# Altium PCB 12864.PcbDoc
Units mm, origin at the board's own origin, x right, y up, seen from the top; angles counter-clockwise.
Board outline 100 x 50 mm, 2 copper layers (Top Layer, Bottom Layer), stack 1.56 mm thick; 21 components, 32 nets, 115 pads, 61 vias.
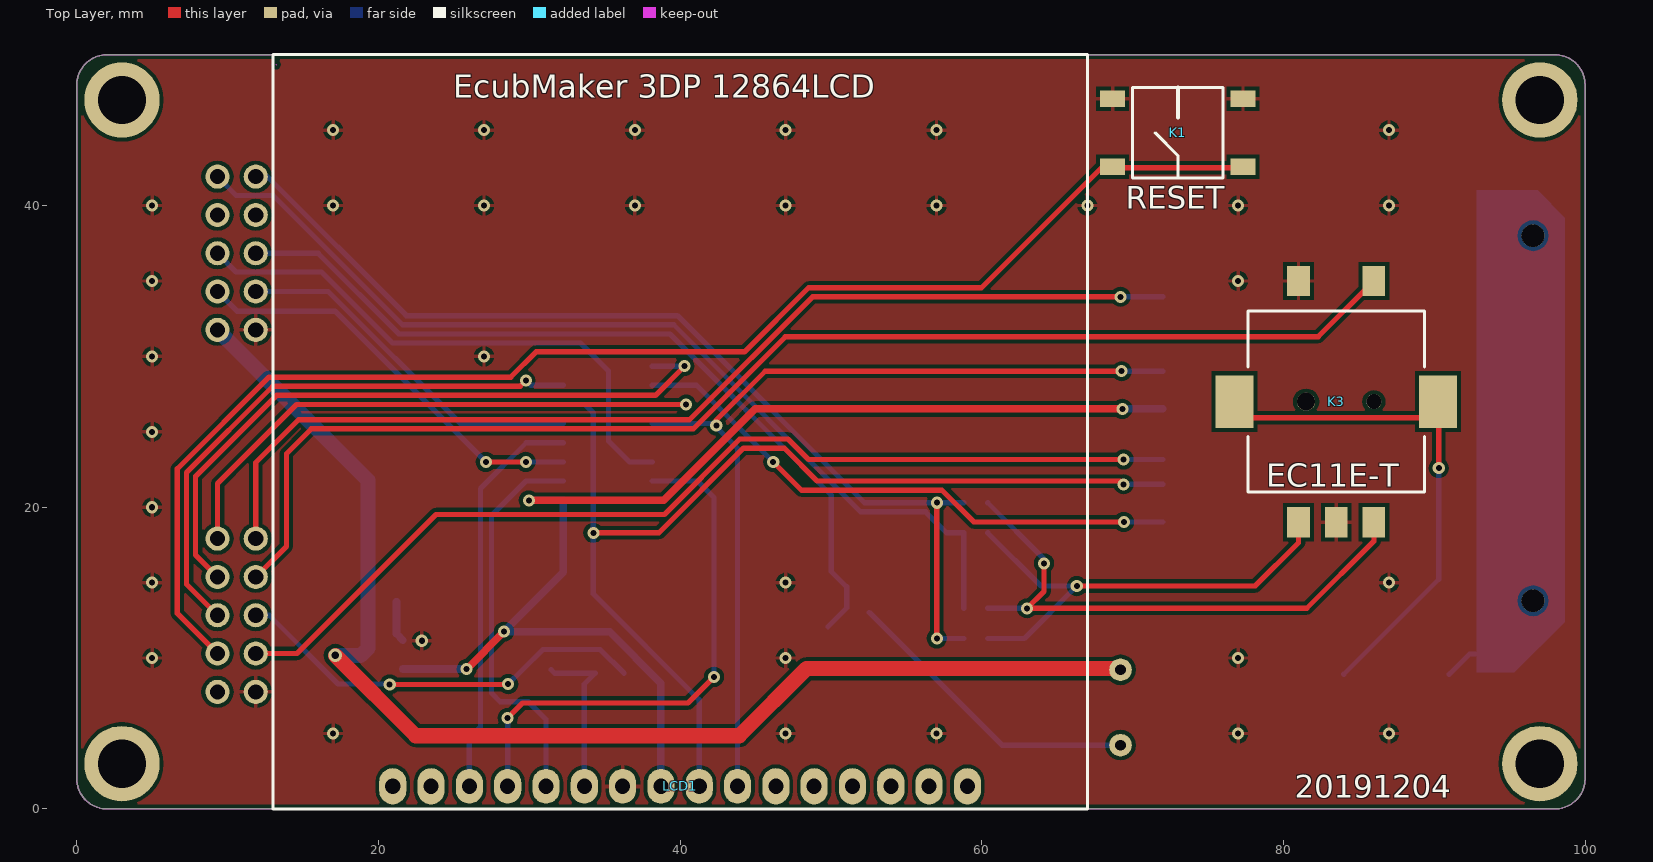
[diagram p0: Top Layer view]
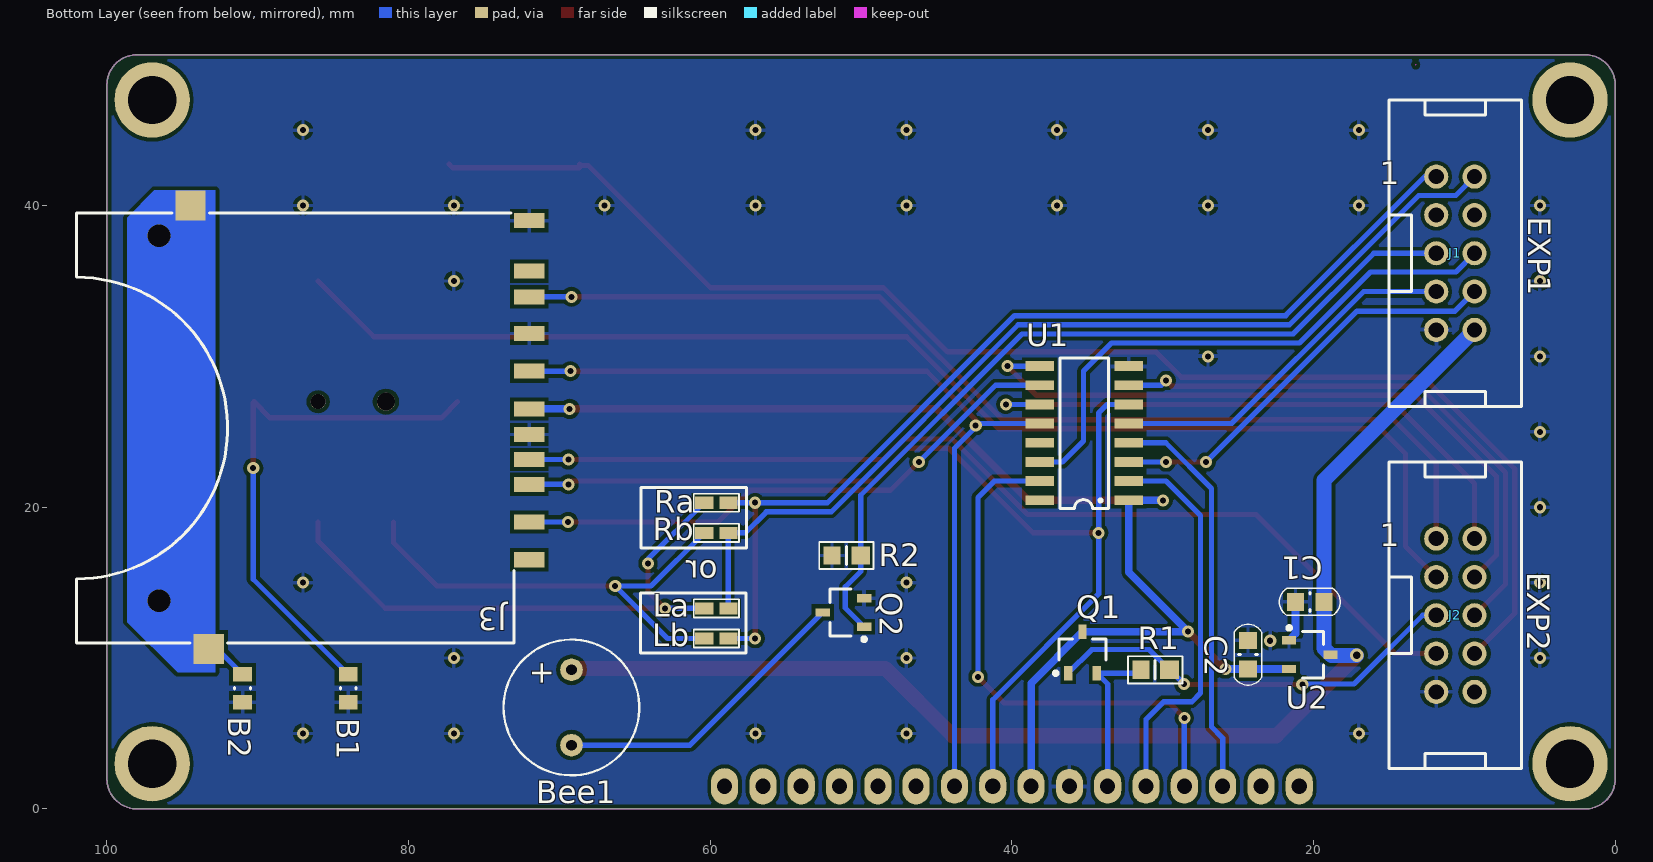
[diagram p1: Bottom Layer view, seen from below]
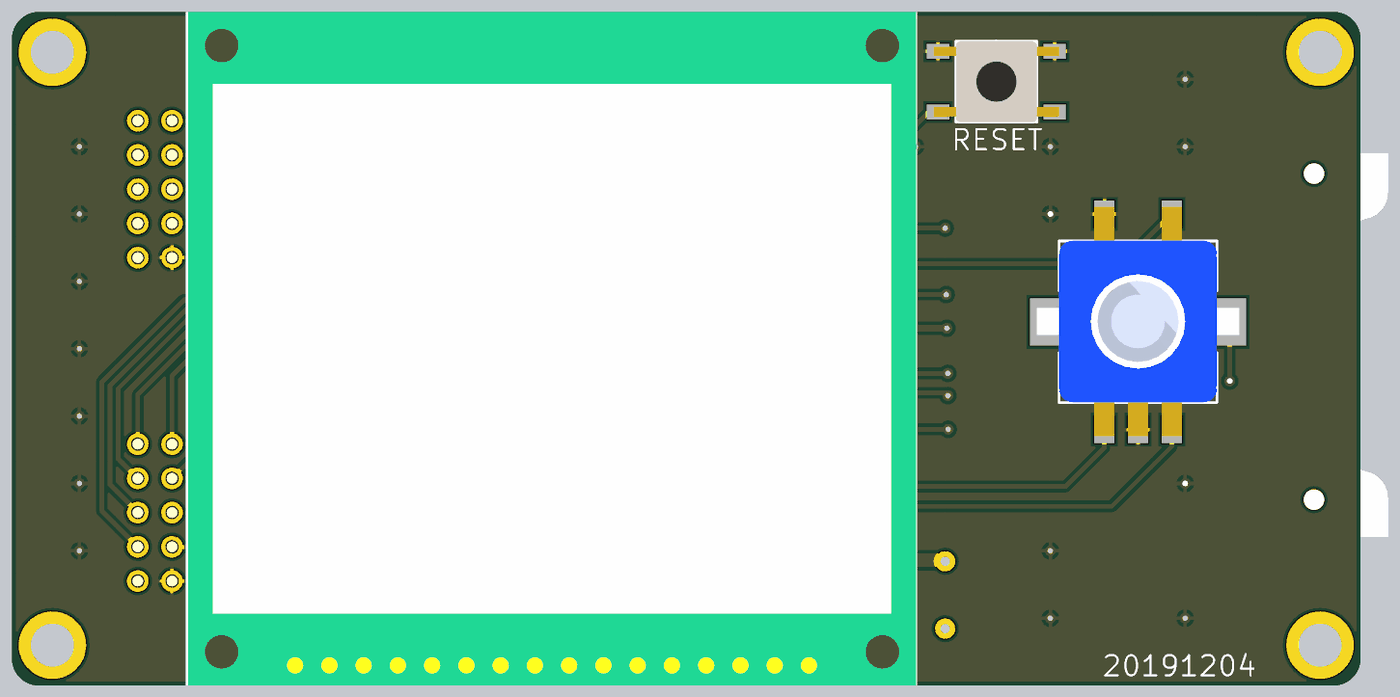
[diagram p2: 3D render of the assembled board from above, using the file's embedded part models]
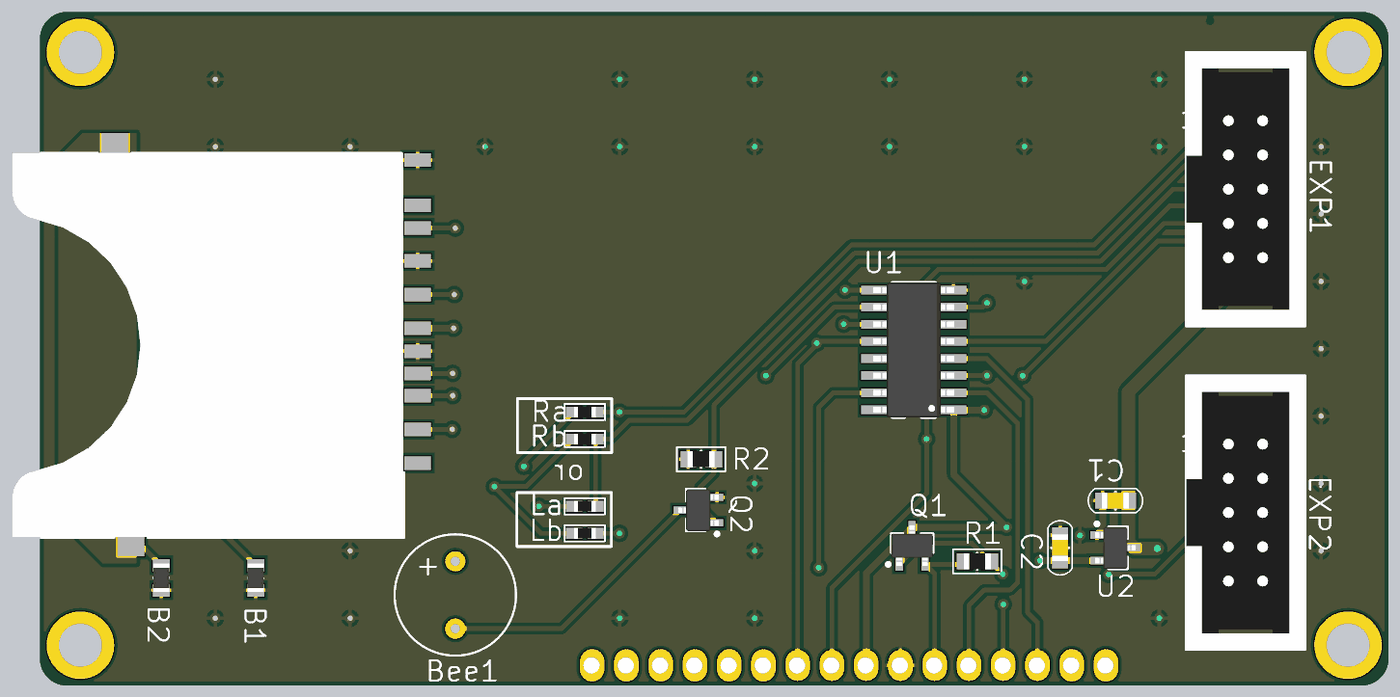
[diagram p3: 3D render of the assembled board from below, using the file's embedded part models]

## Layer stack, top to bottom
Top Solder: solder mask 0.02, Solder Resist, Dk 3.5
Top Layer: signal copper 0.03
Dielectric 1: dielectric 1.5, FR-4, Dk 4.8
Bottom Layer: signal copper 0.03
Bottom Solder: solder mask 0.02, Solder Resist, Dk 3.5

## Board outline
2,0 cw(c2,2) 0,2 0,48 cw(c2,48) 2,50 98,50 cw(c98,48) 100,48 100,2 cw(c98,2) 98,0

## Design rules (kind name [scope] priority, off if disabled: settings)
Clearance [All] p1: gap=0.254
PlaneConnect [All] p1: planeconnectstyle=Relief reliefexpansion=0.508 reliefentries=4 reliefconductorwidth=0.3 reliefairgap=0.3
PolygonConnect [All] p1: connectstyle=Relief reliefconductorwidth=0.254 reliefentries=4 polygonreliefangle="90 Angle" airgapwidth=0.254
RoutingVias [All] p1: holewidth=0.4 width=0.8 viastyle="Through Hole" minholewidth=0.3 minwidth=0.6 maxholewidth=0.4 maxwidth=0.8
SolderMaskExpansion [All] p1: expansion=0.102
Width GND [InNet('GND')] p1: maxlimit=1 minlimit=0.3 preferedwidth=0.5
Width 3v3 [InNet('3V3')] p2: maxlimit=1 minlimit=0.3 preferedwidth=0.5
Width 5v [InNet('5V')] p3: maxlimit=2 minlimit=0.5 preferedwidth=1
Width [All] p4: maxlimit=1 minlimit=0.3 preferedwidth=0.35
29 further rules are at their usual default settings.

## Components (designator, comment, footprint, x,y, rotation, side; value= is the part's Value field where it differs from the comment)
B1 "Bead" Bead0805(2012) 84,8 r90 bottom
B2 "Bead" Bead0805(2012) 91,8 r90 bottom
Bee1 "BUZZER" BUZZER-9*5.5 69.2,6.725 r270 bottom
C1 "1uF" C0805(2012) 20.25,13.725 r180 bottom
C2 "1uF" C0805(2012) 24.35,10.225 r270 bottom
J1 "EXP1" DC3-10P-2.54 15,47 r270 bottom
J2 "EXP2" DC3-10P-2.54 15,23 r270 bottom
J3 "SDCARD" SDCARD-SD-006(www.sofng.com) 73,38 r270 bottom
K1 "RESET" KEY-6x6-T 73,44.825 r180 top
K3 "EC11E-T" EC11E-T 83.5,27 r0 top
La "0" R0603(1608) 59.6,13.3 r0 bottom
Lb "0" R0603(1608) 59.6,11.3 r0 bottom
LCD1 "XN-128641A" XN-128641A 40,0 r0 top
Q1 "(2N7002)NMOS" NMOS-SOT-23 35.325,10.35 r90 bottom
Q2 "(2N7002)NMOS" NMOS-SOT-23 51.15,13.025 r0 bottom
R1 "4K7" R0805(2012) 30.5,9.225 r180 bottom
R2 "4K7" R0805(2012) 50.975,16.8 r180 bottom
Ra "0" R0603(1608) 59.6,20.3 r0 bottom
Rb "0" R0603(1608) 59.6,18.3 r0 bottom
U1 "74HC4050D" 74HC4050D-SO16 35.175,24.925 r0 bottom
U2 "XC6206" XC6206P332MR 20.25,10.225 r180 bottom

## Footprints (in the part's own frame and the unit in brackets; to place one, negate y for a bottom-side part, rotate by r counter-clockwise, add the part's x,y. Pads: shape width x height; smd on the part's side, far side on the other; paste and mask are expansions set on the pad)
74HC4050D-SO16 [mm]
  rect 1.9x0.65 smd: 1(-2.923,4.46) 2(-2.923,3.19) 3(-2.923,1.92) 4(-2.923,0.65) 5(-2.923,-0.62) 6(-2.923,-1.89) 7(-2.923,-3.16) 8(-2.923,-4.43) 9(2.977,-4.43) 10(2.977,-3.16) 11(2.977,-1.89) 12(2.977,-0.62) 13(2.977,0.65) 14(2.977,1.92) 15(2.977,3.19) 16(2.977,4.46)
  silkscreen extent -1.57,-4.99 1.63,5.02, body extent -2.97,-4.98 3.03,5.01, height 1.75
Bead0805(2012) [mm] "Chip Resistor, 2-Leads, Body 2.00x1.20mm, IPC Medium Density"
  rect 0.95x1.25 smd: 1(-0.925,0) 2(0.925,0)
  silkscreen extent -0.05,-0.52 0.05,0.52, body extent -1.05,-0.6 1.05,0.6, height 1
BUZZER-9*5.5 [mm]
  round 1.5 hole 0.7: 1(-2.5,0) 2(2.5,0)
  silkscreen extent -4.5,-4.5 4.5,4.5, body extent -4.45,-4.5 4.55,4.5, height 5.5
C0805(2012) [mm]
  rect 1.14x1.2 smd: 1(-0.95,0) 2(0.95,0)
  silkscreen extent -2.02,-0.9 2.02,0.9, body extent -1,-0.6 1,0.6, height 0.5
DC3-10P-2.54 [mm]
  round 1.6 hole 1: 1(5.08,3.13) 2(5.08,5.67) 3(7.62,3.13) 4(7.62,5.67) 5(10.16,3.13) 6(10.16,5.67) 7(12.7,3.13) 8(12.7,5.67) 9(15.24,3.13) 10(15.24,5.67)
  silkscreen extent 0,0 20.32,8.8, body extent 0,0 20.32,8.8, height 11.3
EC11E-T [mm]
  rect 2.5x3.5 smd: 0(-6.75,0) 0(6.75,0)
  round 1.2 hole 1.2: 1(-2,0)
  round 1 hole 1: 1(2.5,0)
  rect 1.5x2 smd: A(-2.5,-8) B(2.5,-8) C(0,-8) D(-2.5,8) E(2.5,8)
  silkscreen extent -5.85,-6 5.85,6, body extent -7.5,-8.47 7.5,8.53, height 24.1
KEY-6x6-T [mm]
  rect 1.65x1.1 smd: 1(-4.325,2.25) 1(4.325,2.25) 2(-4.325,-2.25) 2(4.325,-2.25)
  silkscreen extent -3,-3 3,3, body extent -4.65,-3 4.65,3, height 6.5
NMOS-SOT-23 [mm]
  rect 0.95x0.55 smd: D(1.4,0) G(-1.35,0.95) S(-1.35,-0.95)
  silkscreen extent -1.47,-1.55 0.92,1.9, body extent -1.47,-1.55 1.53,1.55, height 1.1
R0603(1608) [mm]
  rect 1.2x0.8 smd: 1(-0.8,0) 2(0.8,0)
  silkscreen extent -1.5,-0.6 1.5,0.6, body extent -0.8,-0.4 0.8,0.4, height 0.5
R0805(2012) [mm]
  rect 1.14x1.2 smd: 1(-0.95,0)
  rect 1.24x1.2 smd: 2(0.95,0)
  silkscreen extent -1.8,-0.9 1.8,0.9, body extent -1,-0.6 1,0.6, height 0.5
SDCARD-SD-006(www.sofng.com) [mm]
  rect 2x2 smd: 0(-2,-21.45) 0(27.4,-20.25)
  round 1.5 hole 1.5: 0(0,-23.55) 0(24.2,-23.55)
  rect 1x2 smd: 1(18.98,1) 2(16.48,1) 3(13.18,1) 4(11.48,1) 5(8.98,1) 6(6.48,1) 7(4.05,1) 8(2.35,1) 9(21.48,1) 10(14.83,1) 11(-1,1)
  silkscreen extent -1.5,-29 27,0, body extent -1.53,-29.05 26.98,-0.05, height 2.9
XC6206P332MR [mm] "SOT23, 3-Leads, Body 2.90x2.80mm, Pitch 0.95mm, IPC Medium Density"
  rect 0.95x0.55 smd: 1(-1.375,0.95) 2(-1.375,-0.95) 3(1.375,0)
  silkscreen extent -1.5,-1.55 0.9,1.9, body extent -1.5,-1.55 1.5,1.55, height 1.1
XN-128641A [mm]
  oval 1.8x2.4 hole 1: 1(19.05,1.5) 2(16.51,1.5) 3(13.97,1.5) 4(11.43,1.5) 5(8.89,1.5) 6(6.35,1.5) 15(-16.51,1.5) 16(-19.05,1.5)
  oval 1.8x2.3 hole 1: 7(3.81,1.5) 8(1.27,1.5) 9(-1.27,1.5) 10(-3.81,1.5) 11(-6.35,1.5) 12(-8.89,1.5) 13(-11.43,1.5) 14(-13.97,1.5)
  silkscreen extent -27,0 27,50, body extent -26.95,0 27.05,50, height 7.9

## Part data
C1 C2: library part Caps
J1 J2: library part H5Px2
K1: library part KEY
La Lb R1 R2 Ra Rb: library part Ress
LCD1: library part XN-12864
Q1 Q2: library part NMOS

## Free pads (board coordinates)
  round 5 hole 3.2: 0(3,3) 0(3,47) 0(97,3) 0(97,47)

## Via types
v1: diameter 0.8, hole 0.4, Top Layer to Bottom Layer, tented both sides, 60 vias
v2: diameter 0.9, hole 0.5, Top Layer to Bottom Layer, tented both sides, 1 vias

## Nets (pads, with @x,y where several pads share a name; then routed paths per layer and width w, separated by ;. In a path a pad name is that pad's centre, name@x,y a point inside that pad or via, vN(x,y) a via of type N, cw(c..) or ccw(c..) an arc to the next point about the centre after c; other vN are vias at no path point)
3V3: C2.2 J3.4 LCD1.9 Q1.D U1.1 U2.2 | length 83.5
  Top Layer w0.5: v1(25.85,9.275) v1(28.325,11.75) ; v1(29.975,20.45) 38.925,20.45 44.995,26.52 v1(69.325,26.52)
  Bottom Layer w0.5: U2.2 C2.2 v1(25.85,9.275) ; v1(29.975,20.45) 32.237,20.45 U1.1 32.252,15.677 v1(28.325,11.75) Q1.D 38.73,8.345 LCD1.9 ; v1(69.325,26.52) J3.4
5V: Bee1.1 C1.2 J1.10 U2.3 | length 83.7
  Top Layer w1: v2(17.15,10.175) 22.475,4.85 43.925,4.85 48.375,9.3 Bee1.1@69.2,9.3
  Bottom Layer w1: J1.10 19.3,21.79 C1.2 19.3,10.65 U2.3 18.825,10.175 v2(17.15,10.175)
D16: J1.4
D17: J1.3
D23: J1.5 Q2.G R2.2 | length 54.5
  Bottom Layer w0.35: J1.5 16.006,36.84 21.354,31.492 39.33,31.492 50.025,20.797 R2.2 50.025,15.75 51.05,14.725 51.05,13.325 Q2.G
D25: J1.6 U1.14 | length 37.3
  Bottom Layer w0.35: J1.6 10.57,35.6 16.229,35.6 20.941,30.888 33.387,30.888 35.25,29.025 35.25,24.4 36.645,23.005 U1.14
D27: J1.7 U1.5 | length 24
  Bottom Layer w0.35: J1.7 16.675,34.3 25.43,25.545 U1.5
D29: J1.8 U1.3 | length 27.6
  Top Layer w0.35: v1(27.125,23) 27.13,23.005 v1(29.775,23.005)
  Bottom Layer w0.35: J1.8 10.63,33 17.121,33 27.121,23 v1(27.125,23) ; v1(29.775,23.005) U1.3
D31: J2.3 K3.E | length 85.9
  Top Layer w0.35: J2.3 13.9,17.41 13.9,23.55 15.546,25.196 40.875,25.196 46.979,31.3 82.3,31.3 K3.E
D33: J2.5 Q1.G R1.2 | length 27.9
  Top Layer w0.35: v1(20.75,8.25) v1@28.575,8.25
  Bottom Layer w0.35: J2.5 12.76,12.84 17.324,8.276 20.724,8.276 v1(20.75,8.25) ; v1(28.601,8.276) R1.2 30.9,10.575 34.7,10.575 Q1.G
D35: J1.2 La.1 Rb.1 | length 64.3
  Bottom Layer w0.35: J1.2 10.575,40.675 13.025,40.675 21.604,32.096 39.581,32.096 51.98,19.696 56.283,19.696 57.679,18.3 Rb.1 La.1
D37: J1.1 Lb.1 Ra.1 | length 67
  Top Layer w0.35: v1(57.025,11.3) v1(57.025,20.3)
  Bottom Layer w0.35: J1.1 12.634,41.92 21.854,32.7 39.831,32.7 52.231,20.3 Ra.1 ; v1(57.025,11.3) 56.85,11.3 Lb.1
D41: J2.10
D49: J2.7 J3.10 | length 66.6
  Top Layer w0.35: J2.7 14.6,10.3 23.825,19.525 38.96,19.525 43.957,24.522 47.155,24.522 48.507,23.17 v1(69.4,23.17)
  Bottom Layer w0.35: v1(69.4,23.17) J3.10
D50-MISO: J2.1 J3.7 | length 69.7
  Top Layer w0.35: J2.1 11.87,22.97 14.7,25.8 40.625,25.8 48.775,33.95 v1(69.2,33.95)
  Bottom Layer w0.35: v1(69.2,33.95) J3.7
D51-MOSI: J2.6 U1.7 | length 37.9
  Top Layer w0.35: J2.6 7.275,14.895 7.275,22.3 12.996,28.021 29.396,28.021 v1(29.775,28.4)
  Bottom Layer w0.35: v1(29.775,28.4) 30.09,28.085 U1.7
D52-SCK: J2.2 U1.11 | length 39.2
  Top Layer w0.35: J2.2 9.33,21.58 14.563,26.813 40.388,26.813 v1(40.4,26.825)
  Bottom Layer w0.35: U1.11 40.39,26.815 v1(40.4,26.825)
D53: J2.4 U1.9 | length 44.9
  Top Layer w0.35: J2.4 7.879,16.831 7.879,22.05 13.246,27.417 38.367,27.417 v1(40.3,29.35)
  Bottom Layer w0.35: U1.9 40.295,29.355 v1(40.3,29.35)
GND: B1.1 B2.1 C1.1 C2.1 J1.9 J2.9 J3.3 J3.6 J3.11 K1.2 K3.C K3.D LCD1.10 Q2.S R2.1 U1.8 U2.1 | length 2.7
  Bottom Layer w0.5: C1.1 21.2,11.6 U2.1
  other v1: 17,5 47,5 57,5 77,5 87,5 5,10 47,10 77,10 22.875,11.15 5,15 47,15 87,15 5,20 5,25 5,30 27,30 5,35 77,35 5,40 17,40 27,40 37,40 47,40 57,40 67,40 77,40 87,40 17,45 27,45 37,45 47,45 57,45 87,45
LCD_A0: LCD1.14 U1.4 | length 26.8
  Bottom Layer w0.35: LCD1.14 26.03,4.705 26.775,5.45 26.775,21.25 29.8,24.275 U1.4
LCD_CS: LCD1.12 U1.2 | length 26.2
  Bottom Layer w0.35: LCD1.12 31.11,5.94 29.95,7.1 28.075,7.1 27.496,7.679 27.496,19.446 29.785,21.735 U1.2
LCD_REST: LCD1.13 U1.15 | length 35.8
  Top Layer w0.35: v1(28.57,6.03) 29.565,7.025 40.525,7.025 v1(42.25,8.75)
  Bottom Layer w0.35: LCD1.13 v1(28.57,6.03) ; U1.15 41.165,21.735 42.25,20.65 v1(42.25,8.75)
MOSI: J3.2 LCD1.8 U1.6 | length 71
  Top Layer w0.35: v1(34.25,18.3) 38.589,18.3 44.207,23.918 46.905,23.918 49.089,21.733 69.187,21.733 v1(69.4,21.52)
  Bottom Layer w0.35: U1.6 33.685,26.815 34.25,26.25 34.25,14.25 41.27,7.23 LCD1.8 ; v1(69.4,21.52) J3.2
NetB1_2: B1.2 K3.0 | length 35.1
  Top Layer w0.35: K3.0@76.75,27 77.825,25.925 89.175,25.925 90.25,27 90.3,26.95 v1(90.3,22.6)
  Bottom Layer w0.35: B1.2 90.3,15.225 v1(90.3,22.6)
NetB2_2: B2.2 J3.0 | length 3.8
  Bottom Layer w0.35: B2.2 92.35,10.275 94.25,10.275
NetBee1_2: Bee1.2 Q2.D | length 20.3
  Bottom Layer w0.35: Q2.D 61.35,4.225 Bee1.2
NetK3_A: K3.A Lb.2 Rb.2 | length 31.9
  Top Layer w0.35: v1(66.3,14.775) 78.125,14.775 81,17.65 K3.A
  Bottom Layer w0.35: Lb.2 62.825,11.3 v1(66.3,14.775) 63.925,14.775 Rb.2
NetK3_B: K3.B La.2 Ra.2 | length 37.7
  Top Layer w0.35: v1(64.125,16.275) 64.125,14.425 v1(63,13.3) 81.55,13.3 86,17.75 K3.B
  Bottom Layer w0.35: La.2 v1(63,13.3) ; Ra.2 64.125,16.575 v1(64.125,16.275)
NetLCD1_11: LCD1.11 Q1.S R1.1 | length 10.8
  Bottom Layer w0.35: R1.1 31.675,9 Q1.S 33.65,8.275 LCD1.11
RESET: J2.8 K1.1 | length 92.7
  Top Layer w0.35: J2.8 6.671,12.959 6.671,22.55 12.746,28.625 28.775,28.625 30.45,30.3 44.271,30.3 48.525,34.554 59.979,34.554 68.088,42.662 68.588,42.662 68.675,42.75 68.675,42.5 77.075,42.5 K1.1@77.325,42.75
SCLK: J3.5 LCD1.7 U1.12 | length 60.1
  Top Layer w0.35: v1(42.4,25.425) 42.4,25.775 45.645,29.02 v1(69.275,29.02)
  Bottom Layer w0.35: U1.12 42.28,25.545 v1(42.4,25.425) 42.4,25.325 43.81,23.915 LCD1.7 ; v1(69.275,29.02) J3.5
SD_CS: J3.1 U1.10 | length 37.6
  Top Layer w0.35: v1(46.175,23) 48.046,21.129 57.368,21.129 59.477,19.02 v1(69.425,19.02)
  Bottom Layer w0.35: U1.10 41.09,28.085 v1(46.175,23) ; v1(69.425,19.02) J3.1
pads on no net: J3.8 J3.9 K3.1 LCD1.1 LCD1.2 LCD1.3 LCD1.4 LCD1.5 LCD1.6 LCD1.15 LCD1.16 U1.13 U1.16

## Polygon pours and split planes (outlines as drawn)
GND on Top Layer "Top Overlay-No Net" (solid, pour order 4): 2,50 0,48 0,2 2,0 98,0 100,2 100,48 98,50
GND on Bottom Layer "Top Overlay-No Net" (solid, pour order 8): 2,50 0,48 0,2 2,0 98,0 100,2 100,48 98,50

## Keep-outs
Keep-Out Layer:
  lines w0.1: 13.222,49.328 cw(c13.232,49.328) 13.232,49.338 ; 0,2 ccw(c2,2) 2,0 98,0 ccw(c98,2) 100,2 100,48 ccw(c98,48) 98,50 2,50 ccw(c2,48) 0,48 0,2

## Other copper
Bottom Layer:
  region net NetB2_2: 92.825,41 96.85,41 98.65,39.2 98.65,12.388 95.312,9.05 92.825,9.05

## Silkscreen, mask and mechanical layers (free items; w line width, h text height)
Top Overlay:
  text "EcubMaker 3DP 12864LCD" at 24.975,47.15 h1.52
  text "20191204" at 80.75,0.75 h1.5
Bottom Overlay:
  lines w0.2: 57.6,17.3 57.6,21.3 64.6,21.3 64.6,17.3 57.6,17.3 ; 57.625,10.325 64.625,10.325 64.625,14.325 57.625,14.325 57.625,10.325
  text "or" at 59.5,15.325 h1.5

## Text inside footprints (layer, text, board x,y; h text height)
Bee1: Bottom Overlay "+" at 71.8,9.85 h1.5 r90
J1: Bottom Overlay "1" at 15.6,41.4 h1.5
J2: Bottom Overlay "1" at 15.6,17.4 h1.5